# Altium PCB BeagleBone_Black_RevB4_V1.PcbDoc (part 1 of 2)
Units mm, origin at the board's own origin, x right, y up, seen from the top; angles counter-clockwise.
Board outline 100 x 101.6 mm, 4 copper layers (Top Layer, Layer 1, Layer 2, Bottom Layer), stack 0.603 mm thick; 71 components, 245 nets, 903 pads, 74 vias.
Unrouted connection lines stored in the file: 485.
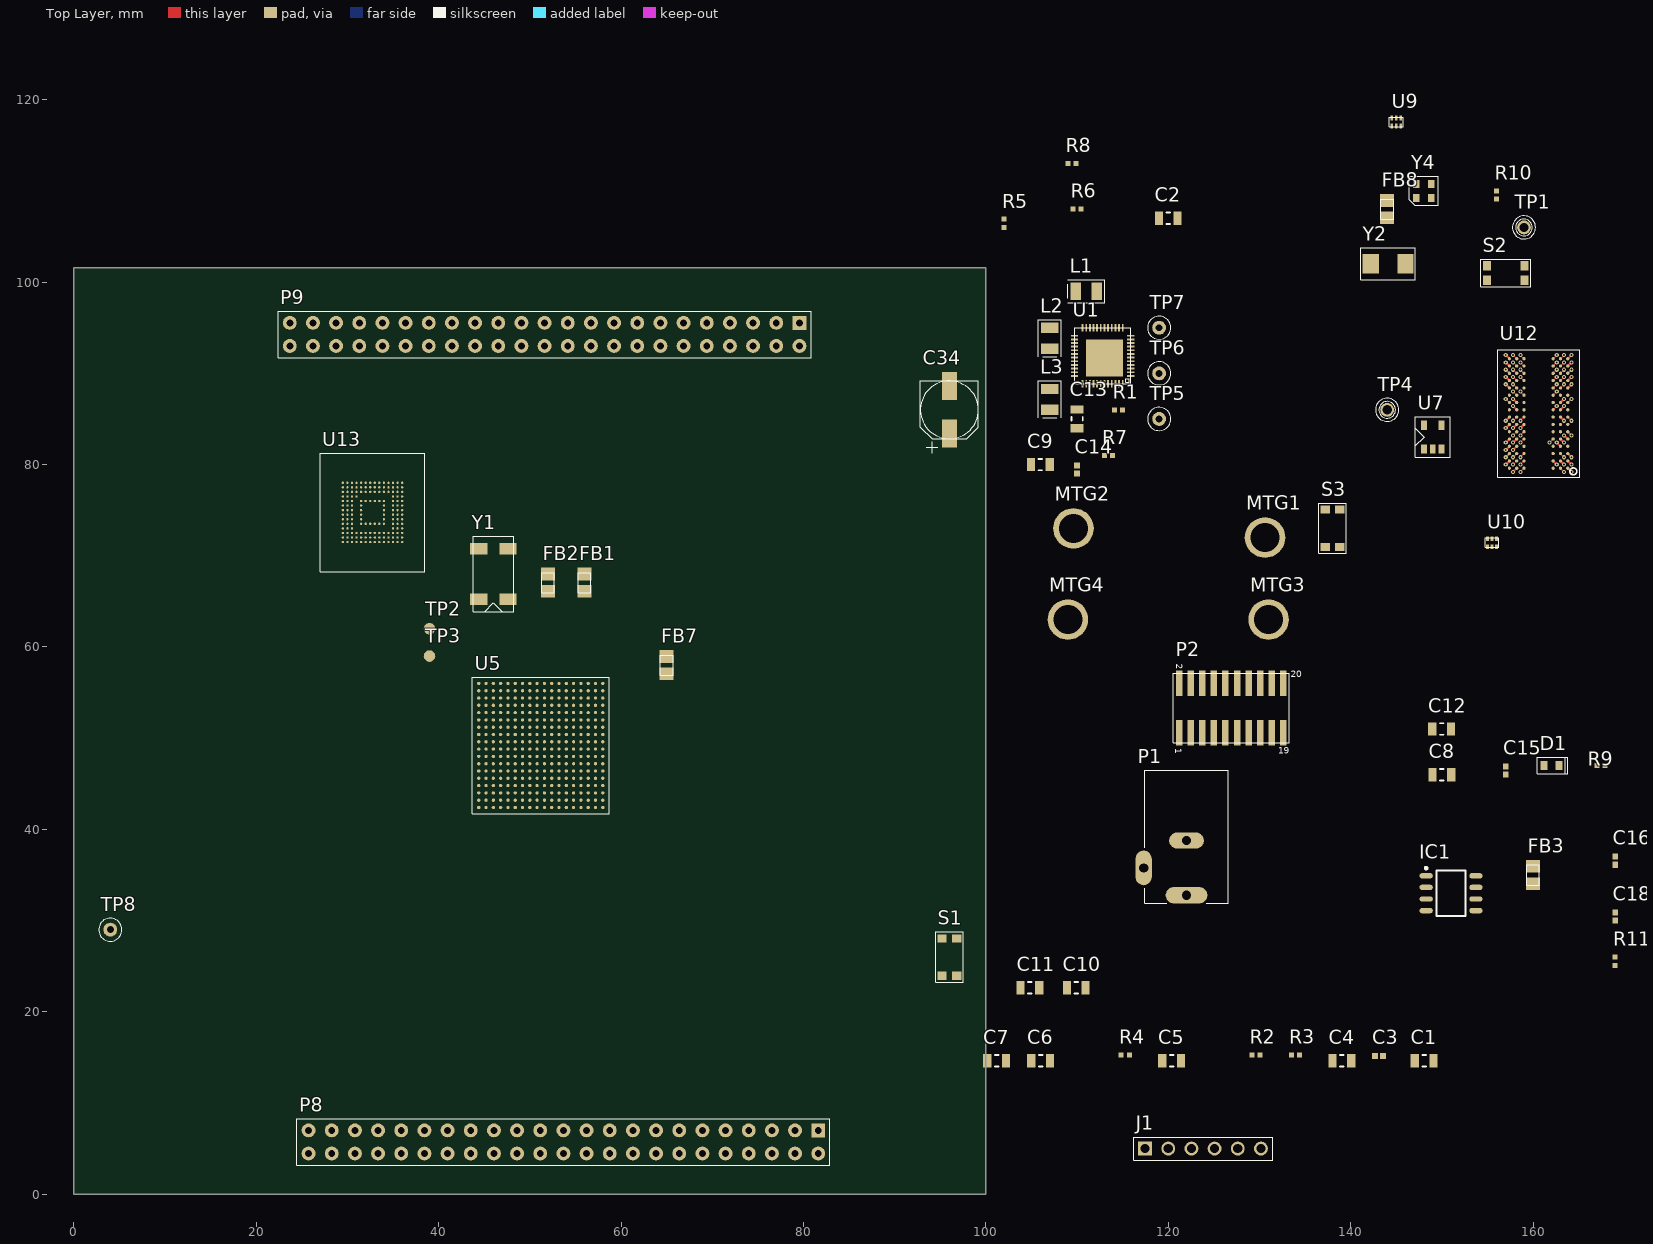
[diagram p0: Top Layer view]
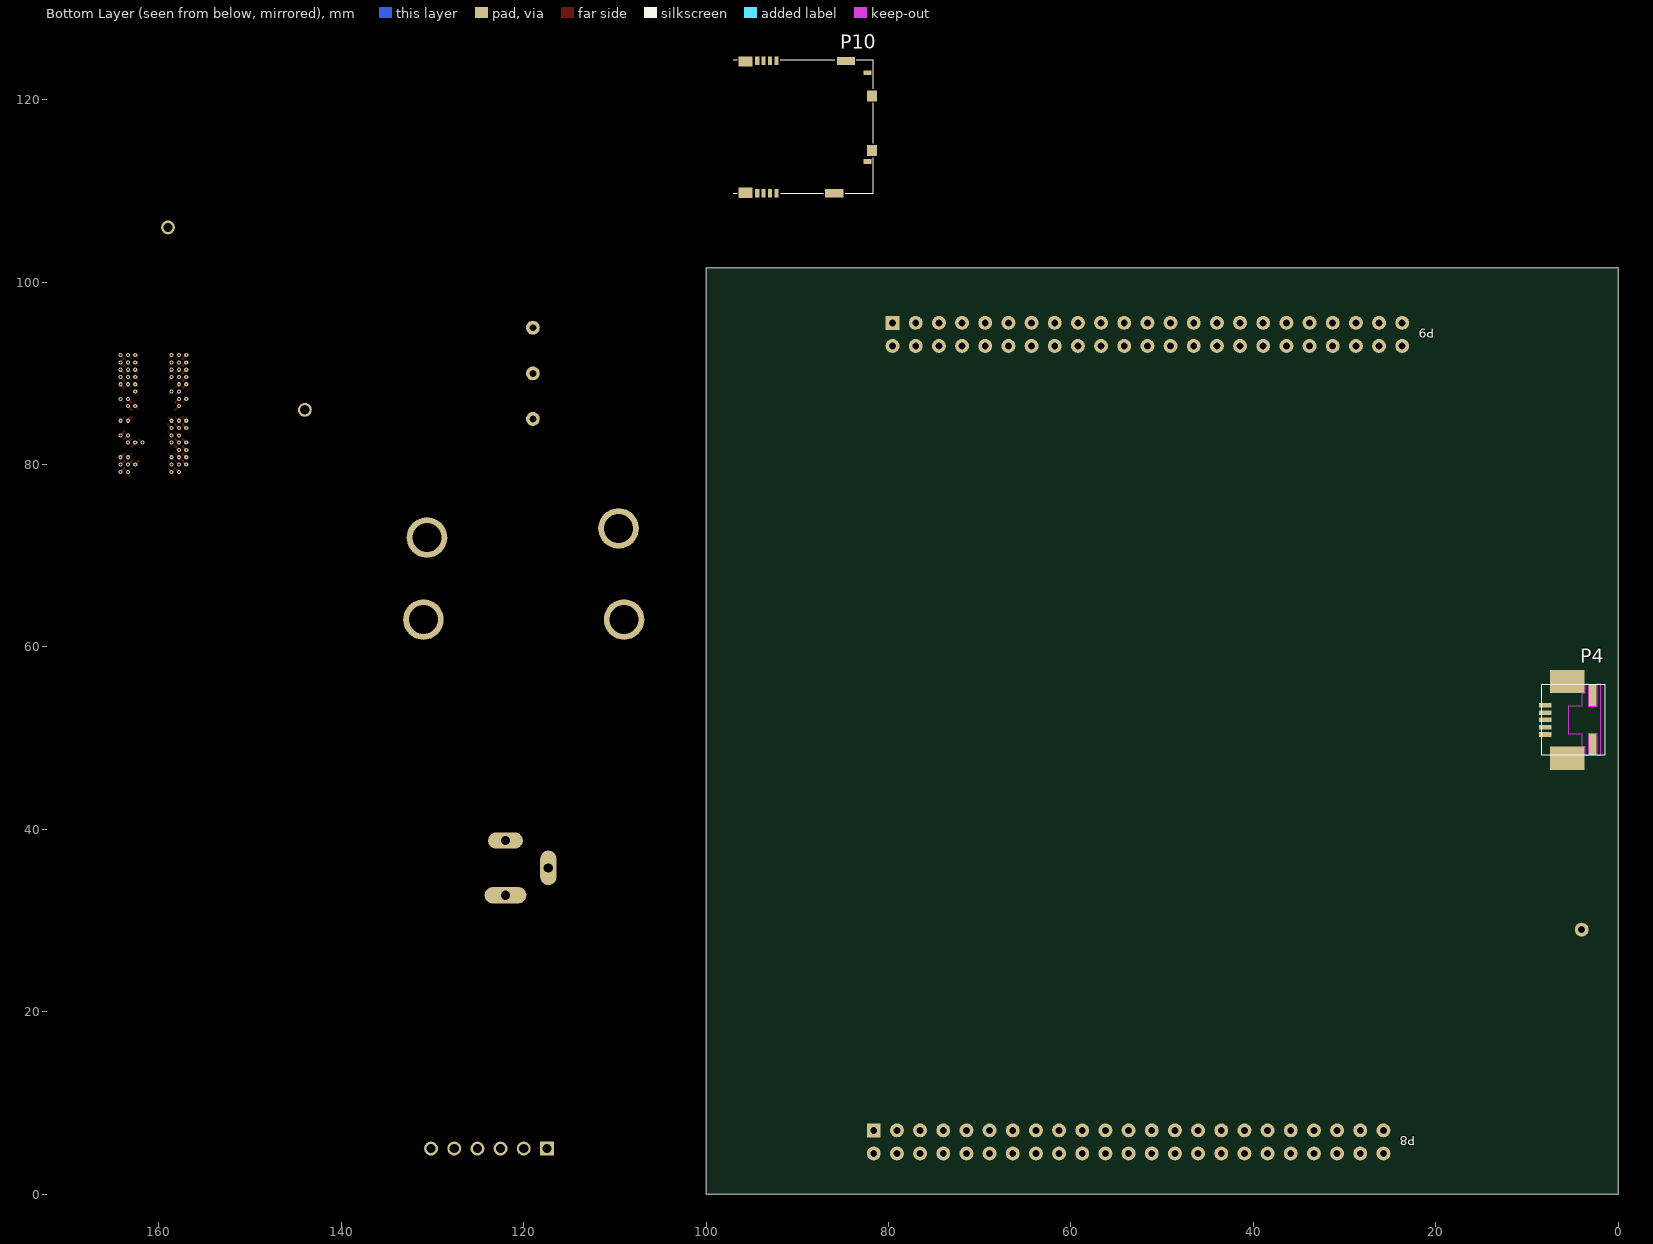
[diagram p1: Bottom Layer view, seen from below]
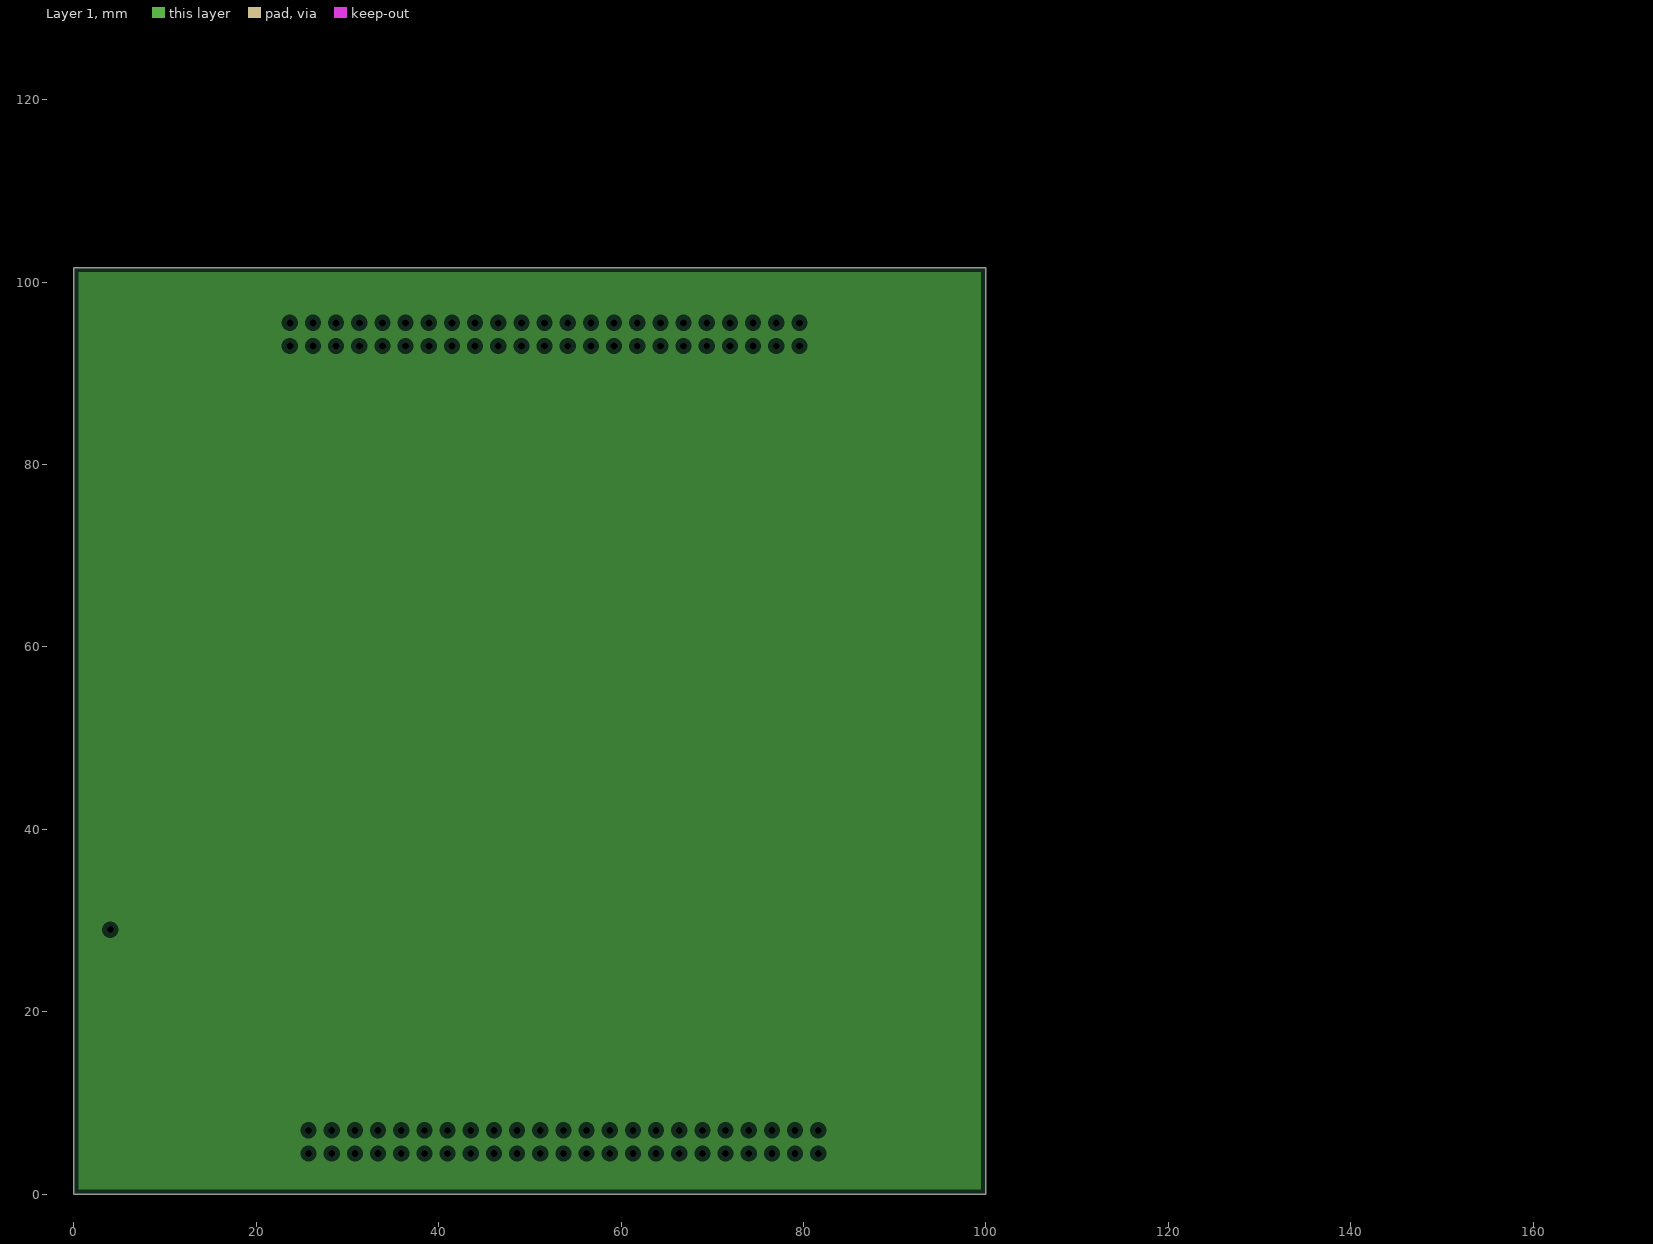
[diagram p2: Layer 1, clearances drawn from the general rule]
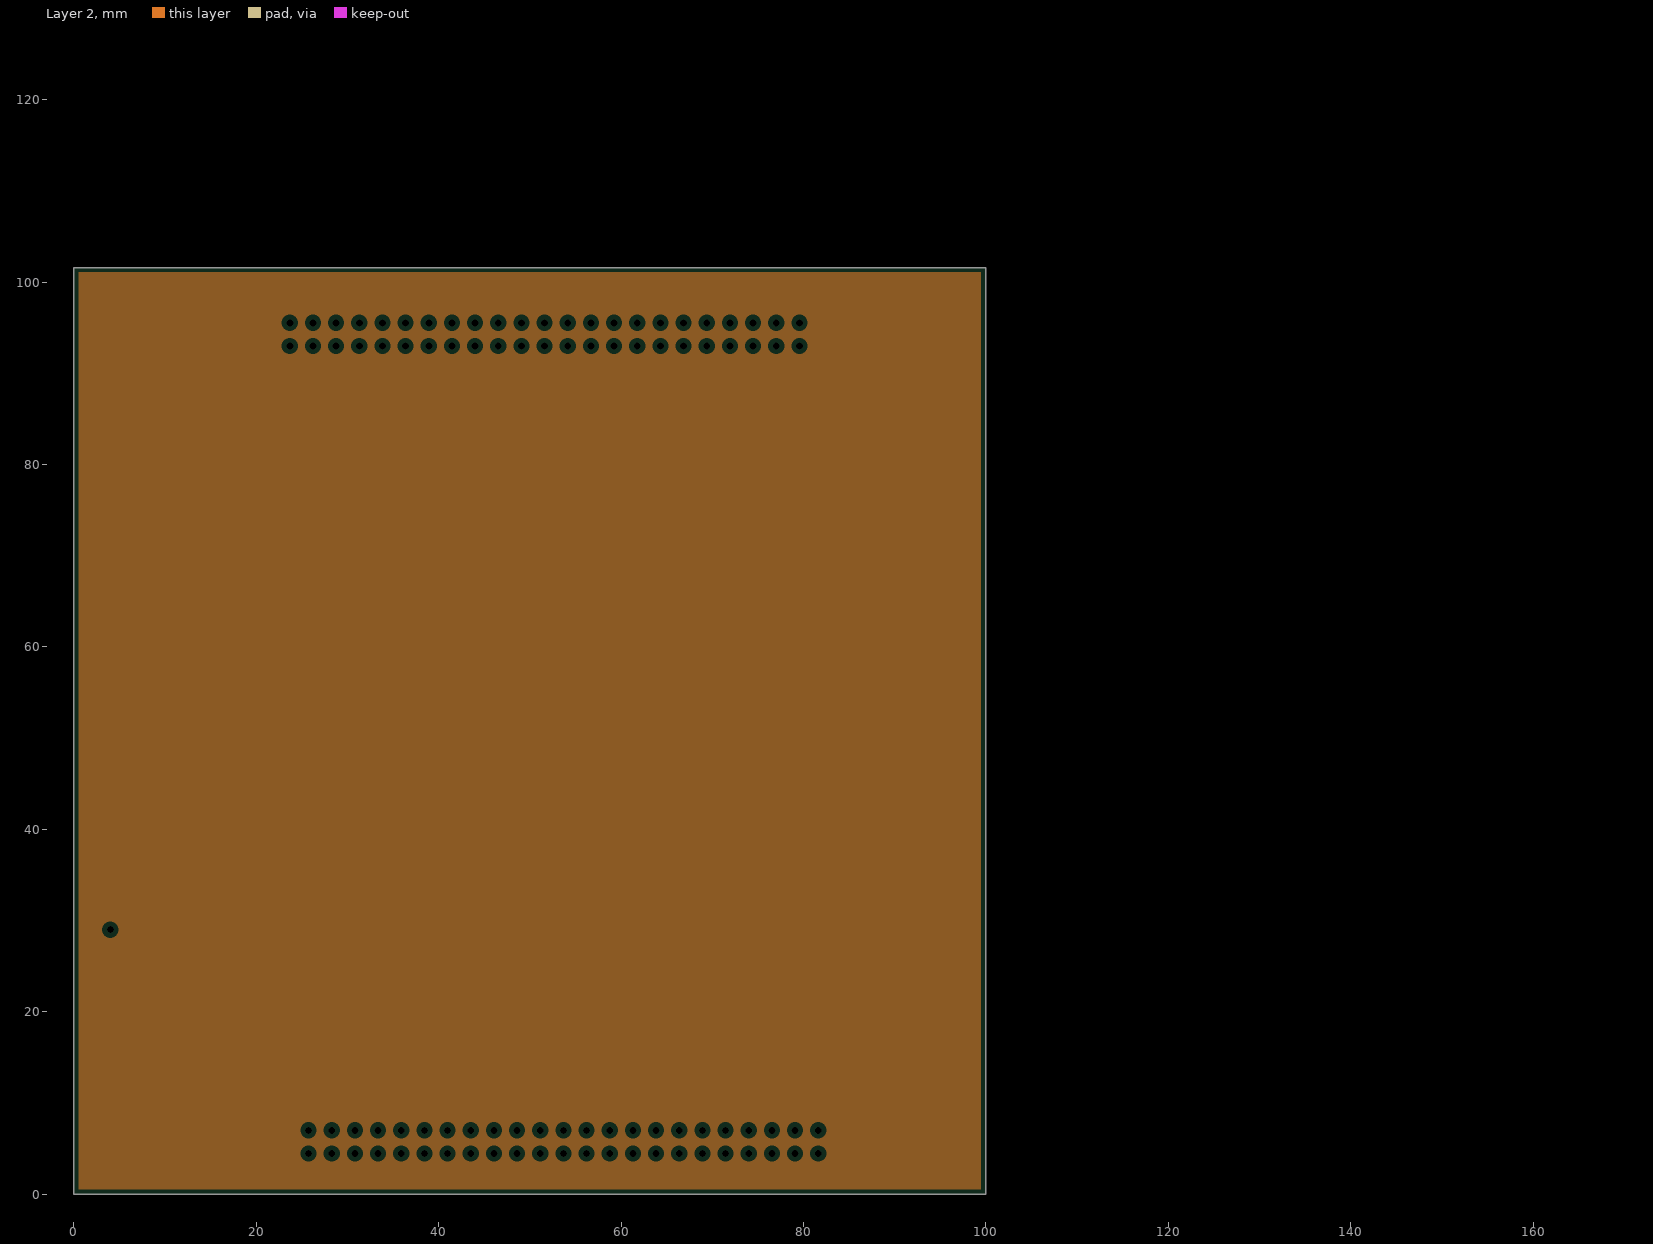
[diagram p3: Layer 2, clearances drawn from the general rule]

## Layer stack, top to bottom
Top Solder: solder mask 0.0102, Solder Resist, Dk 3.5
Top Layer: signal copper 0.0356
Dielectric 2: prepreg 0.0711, PP-006, Dk 4.1
Layer 1: plane copper 0.035
Dielectric 1: dielectric 0.32, FR-4, Dk 4.8
Layer 2: plane copper 0.035
Dielectric 3: prepreg 0.0711, PP-006, Dk 4.1
Bottom Layer: signal copper 0.0356
Bottom Solder: solder mask 0.0102, Solder Resist, Dk 3.5

## Board outline
0,0 100,0 100,101.6 0,101.6

## Design rules (kind name [scope] priority, off if disabled: settings)
Clearance [All] p1: gap=0.254 ignorepadtopadclearanceinfootprint=FALSE except(0: Arc-Hole Track-Hole SMDPad-Hole THPad-Hole Via-Hole Fill-Hole Poly-Hole Region-Hole Text-Hole)
PlaneClearance [All] p1: clearance=0.508
PlaneConnect [All] p1: planeconnectstyle=Relief reliefexpansion=0.508 reliefentries=4 reliefconductorwidth=0.254 reliefairgap=0.254
PolygonConnect [All] p1: connectstyle=Relief reliefconductorwidth=0.254 reliefentries=4 polygonreliefangle="90 Angle" airgapwidth=0.254
RoutingVias [All] p1: holewidth=0.711 width=1.27 viastyle="Through Hole" minholewidth=0.711 minwidth=1.27 maxholewidth=0.711 maxwidth=1.27
SolderMaskExpansion [All] p1: expansion=0.102
Width [All] p1: maxlimit=0.254 minlimit=0.254 preferedwidth=0.254
28 further rules are at their usual default settings.

## Classes and differential pairs
net class DDR_D[15..0]: DDR_D0 DDR_D1 DDR_D2 DDR_D3 DDR_D4 DDR_D5 DDR_D6 DDR_D7 DDR_D8 DDR_D9 DDR_D10 DDR_D11 DDR_D12 DDR_D13 DDR_D14 DDR_D15
net class DDR_BA[2..0]: DDR_BA0 DDR_BA1 DDR_BA2
net class DDR_A[15..0]: DDR_A0 DDR_A1 DDR_A2 DDR_A3 DDR_A4 DDR_A5 DDR_A6 DDR_A7 DDR_A8 DDR_A9 DDR_A10 DDR_A11 DDR_A12 DDR_A13 DDR_A14 DDR_A15
component class "P11_Exp Conn, uSD, and ": C152 C153 C154 P8 P9 R150 R151 R152 R153 R154 R155 R156 R157 TP4 U7
component class P08_eMMC: C125 C126 C127 C128 C129 C130 R101 R102 R103 R104 R105 R106 R107 R108 R109 R110 R111 U13
component class "P07_DDR3 Memory": C107 C108 C109 C110 C111 C112 C113 C114 C115 C116 C117 C118 C119 C120 C121 C122 C123 C124 R96 R97 R98 R99 R100 U12
component class "P06_LED, Config, & Button": R55 R56 R57 R58 R59 R60 R61 R62 R63 R64 R65 R66 R67 R68 R69 R70 R75 R80 R81 R82 R83 R84 R85 R86 R87 R88 R89 R90 R91 R92 R93 R94 R95 S2
component class "P04_Processor 2 or 3, USB and Serial": C31 C32 C33 C34 C35 C36 C155 FB7 FB8 J1 P4 R26 R27 R28 R45 R46 R47 R48 R49 R50 R51 R52 R53 R159 R163 R164 R165 U8 U9 U10 U15
component class "P03_Processor 1 of 3, JTAG Header": C21 C22 C24 C25 C26 C27 C28 C29 C30 C158 C159 P2 R14 R17 R18 R19 R20 R21 R22 R23 R24 R25 R160 R161 R162 R167 S1 U3 U5 U6 Y1 Y2 Y4
component class "P02_Power Management": C1 C2 C3 C4 C5 C6 C7 C8 C9 C10 C11 C12 C13 C14 C15 C16 C17 C18 D1 IC1 L1 L2 L3 MTG1 MTG2 MTG3 MTG4 P1 R1 R2 R3 R4 R5 R6 R7 R8 R9 R10 R11 S3 TP1 TP5 TP6 TP7 TP8 U1

## Components (designator, comment, footprint, x,y, rotation, side; value= is the part's Value field where it differs from the comment)
C1 "C2012X6S1A106K085AC" CAP0805 148.046,14.64 r0 top
C2 "C2012X6S1A106K085AC" CAP0805 120,107 r0 top
C3 "C0402C104K4RACTU" CAP0402 143.093,15.148 r0 top
C4 "C2012X6S1A106K085AC" CAP0805 139.029,14.64 r0 top
C5 "C2012X6S1A106K085AC" CAP0805 120.36,14.64 r0 top
C6 "C2012X6S1A106K085AC" CAP0805 106.009,14.64 r0 top
C7 "C2012X6S1A106K085AC" CAP0805 101.183,14.64 r0 top
C8 "C2012X6S1A106K085AC" CAP0805 150,46 r0 top
C9 "C2012X6S1A106K085AC" CAP0805 105.975,80 r0 top
C10 "C2012X6S1A106K085AC" CAP0805 109.907,22.64 r0 top
C11 "C2012X6S1A106K085AC" CAP0805 104.827,22.64 r0 top
C12 "C2012X6S1A106K085AC" CAP0805 149.975,51 r0 top
C13 "C2012X6S1A106K085AC" CAP0805 110,85 r90 top
C14 "C1005X5R0J225K050BC" CAP0402 110,79.44 r90 top
C15 "C1005X5R0J225K050BC" CAP0402 157,46.44 r90 top
C16 "C1005X5R0J225K050BC" CAP0402 169,36.56 r90 top
C18 "C0402C104K4RACTU" CAP0402 169,30.44 r90 top
C34 "100uF, 6V3" RD205SMD_250D 96,86 r90 top
D1 "598-8170-107F" LED_0603 162,47 r180 top
FB1 "150OHM800mA" SM-7351-IND-0805 56,67.05 r90 top
FB2 "150OHM800mA" SM-7351-IND-0805 52,67.05 r90 top
FB3 "150OHM800mA" SM-7351-IND-0805 160,35 r90 top
FB7 "150OHM800mA" SM-7351-IND-0805 65,58 r90 top
FB8 "0.1 Ohm, 0805" SM-7351-IND-0805 144,108 r90 top
IC1 "TL5209" SOIC-8 151,33 r0 top
J1 "HEADER 6" SIP6 123.81,5 r90 top
L1 "2.2uH, 2.6A" 2520 111,99 r180 top
L2 "2.2uH, 2.6A" 2520 107,93.857 r270 top
L3 "2.2uH, 2.6A" 2520 107,87.143 r270 top
MTG1 "MHOLE" MTGH200C125D_PL 131,72 r0 top
MTG2 "MHOLE" MTGH200C125D_PL 110,73 r0 top
MTG3 "MHOLE" MTGH200C125D_PL 131.394,63 r0 top
MTG4 "MHOLE" MTGH200C125D_PL 109.394,63 r0 top
P1 "PJ-200A" CONN3-PWR-PJ102A 122,39 r90 top
P2 "CTI JTAG,DNI" HEADER10X2_SMD 126.905,53.295 r180 top
P4 "mini USB-B" USB5MINI_4SHIELDED_SMD-5 5,52 r180 bottom
P8 "FEMALE HEADER 2x23" HEADER23X2 53.68,5.73 r180 top
P9 "FEMALE HEADER 2x23" HEADER23X2 51.62,94.27 r180 top
P10 "MOLEX 502570-001" SD-MICRO-SCHA5B0300 89,117 r90 bottom
R1 "RC0402FR-07100KL" RES0402 114.55,86 r180 top
R2 "RC0402FR-071K5L" RES0402 129.631,15.275 r0 top
R3 "RC0402FR-071K5L" RES0402 133.949,15.275 r0 top
R4 "RC0402JR-070RL" RES0402 115.28,15.275 r0 top
R5 "RC0402JR-070RL" RES0402 102,106.45 r90 top
R6 "RC0402JR-070RL" RES0402 110,108 r0 top
R7 "RC0402JR-070RL" RES0402 113.45,81 r0 top
R8 "RC0402JR-070RL" RES0402 109.45,113 r0 top
R9 "RC0402FR-07820RL" RES0402 167.45,47 r0 top
R10 "RC0402FR-07470KL" RES0402 156,109.55 r90 top
R11 "RC0402FR-07280KL" RES0402 169,25.55 r90 top
S1 "KMR231GLFS" SW4SMD_63X161LS 96,26 r90 top
S2 "KMR231GLFS" SW4SMD_63X161LS 157,101 r0 top
S3 "KMR231GLFS" SW4SMD_63X161LS 138,73 r270 top
TP1 "TESTPT1" tp1-8040 159,106 r0 top
TP2 "TESTPT1" TP60C_SMD 39,62 r90 top
TP3 "TESTPT1" TP60C_SMD 39,59 r90 top
TP4 "TESTPT1" tp1-8040 144,86 r0 top
TP5 "TESTPT1" TP60C33D 119,85 r0 top
TP6 "TESTPT1" TP60C33D 119,90 r0 top
TP7 "TESTPT1" TP60C33D 119,95 r0 top
TP8 "TESTPT1" TP60C33D 4,29 r0 top
U1 "TPS65217C" U_48_RSL 112.8,91.925 r180 top
U5 "IC_AM335X_ZCE_1" am33xx_15x15 51.2,49.2 r0 top
U7 "24LC32A" SOT23-5 149,83 r180 top
U9 "TPD4S012" U_6_DRY 145,117.561 r0 top
U10 "TPD4S012" U_6_DRY 155.5,71.439 r0 top
U12 "MT41K256M16HA -125:E" BGA96_T9_P8_9X14 160.6,85.6 r180 top
U13 "eMMC, 2GB" BGA153_P14_P5_11P5X13 32.75,74.75 r0 top
Y1 "32.768kHz" XTAL4_126-216SMD 46,68 r90 top
Y2 "24MHz" XTAL150SMD_125X196 144.1,102 r180 top
Y4 "24.576MHz" OSC4_61X65LS_79X98SMD 148,110 r0 top

## Footprints (in the part's own frame and the unit in brackets; to place one, negate y for a bottom-side part, rotate by r counter-clockwise, add the part's x,y. Pads: shape width x height; smd on the part's side, far side on the other; paste and mask are expansions set on the pad)
2520 [mil] "2520"
  rect 45x75 smd mask+2: 1(45,0) 2(-45,0)
  silkscreen extent -80,-50 80,50
am33xx_15x15 [mil] "AM33XX_15X15"
  round 14 smd mask+0: A1(-267.72,267.72) A2(-236.22,267.72) A3(-204.72,267.72) A4(-173.23,267.72) A5(-141.73,267.72) A6(-110.24,267.72) A7(-78.74,267.72) A8(-47.24,267.72) A9(-15.75,267.72) A10(15.75,267.72) A11(47.24,267.72) A12(78.74,267.72) A13(110.24,267.72) A14(141.73,267.72) A15(173.23,267.72) A16(204.72,267.72) A17(236.22,267.72) A18(267.72,267.72) B1(-267.72,236.22) B2(-236.22,236.22) B3(-204.72,236.22) B4(-173.23,236.22) B5(-141.73,236.22) B6(-110.24,236.22) B7(-78.74,236.22) B8(-47.24,236.22) B9(-15.75,236.22) B10(15.75,236.22) B11(47.24,236.22) B12(78.74,236.22) B13(110.24,236.22) B14(141.73,236.22) B15(173.23,236.22) B16(204.72,236.22) B17(236.22,236.22) B18(267.72,236.22) C1(-267.72,204.72) C2(-236.22,204.72) C3(-204.72,204.72) C4(-173.23,204.72) C5(-141.73,204.72) C6(-110.24,204.72) C7(-78.74,204.72) C8(-47.24,204.72) C9(-15.75,204.72) C10(15.75,204.72) C11(47.24,204.72) C12(78.74,204.72) C13(110.24,204.72) C14(141.73,204.72) C15(173.23,204.72) C16(204.72,204.72) C17(236.22,204.72) C18(267.72,204.72) D1(-267.72,173.23) D2(-236.22,173.23) D3(-204.72,173.23) D4(-173.23,173.23) D5(-141.73,173.23) D6(-110.24,173.23) D7(-78.74,173.23) D8(-47.24,173.23) D9(-15.75,173.23) D10(15.75,173.23) D11(47.24,173.23) D12(78.74,173.23) D13(110.24,173.23) D14(141.73,173.23) D15(173.23,173.23) D16(204.72,173.23) D17(236.22,173.23) D18(267.72,173.23) E1(-267.72,141.73) E2(-236.22,141.73) E3(-204.72,141.73) E4(-173.23,141.73) E5(-141.73,141.73) E6(-110.24,141.73) E7(-78.74,141.73) E8(-47.24,141.73) E9(-15.75,141.73) E10(15.75,141.73) E11(47.24,141.73) E12(78.74,141.73) E13(110.24,141.73) E14(141.73,141.73) E15(173.23,141.73) E16(204.72,141.73) E17(236.22,141.73) E18(267.72,141.73) F1(-267.72,110.24) F2(-236.22,110.24) F3(-204.72,110.24) F4(-173.23,110.24) F5(-141.73,110.24) F6(-110.24,110.24) F7(-78.74,110.24) F8(-47.24,110.24) F9(-15.75,110.24) F10(15.75,110.24) F11(47.24,110.24) F12(78.74,110.24) F13(110.24,110.24) F14(141.73,110.24) F15(173.23,110.24) F16(204.72,110.24) F17(236.22,110.24) F18(267.72,110.24) G1(-267.72,78.74) G2(-236.22,78.74) G3(-204.72,78.74) G4(-173.23,78.74) G5(-141.73,78.74) G6(-110.24,78.74) G7(-78.74,78.74) G8(-47.24,78.74) G9(-15.75,78.74) G10(15.75,78.74) G11(47.24,78.74) G12(78.74,78.74) G13(110.24,78.74) G14(141.73,78.74) G15(173.23,78.74) G16(204.72,78.74) G17(236.22,78.74) G18(267.72,78.74) H1(-267.72,47.24) H2(-236.22,47.24) H3(-204.72,47.24) H4(-173.23,47.24) H5(-141.73,47.24) H6(-110.24,47.24) H7(-78.74,47.24) H8(-47.24,47.24) H9(-15.75,47.24) H10(15.75,47.24) H11(47.24,47.24) H12(78.74,47.24) H13(110.24,47.24) H14(141.73,47.24) H15(173.23,47.24) H16(204.72,47.24) H17(236.22,47.24) H18(267.72,47.24) J1(-267.72,15.75) J2(-236.22,15.75) J3(-204.72,15.75) J4(-173.23,15.75) J5(-141.73,15.75) J6(-110.24,15.75) J7(-78.74,15.75) J8(-47.24,15.75) J9(-15.75,15.75) J10(15.75,15.75) J11(47.24,15.75) J12(78.74,15.75) J13(110.24,15.75) J14(141.73,15.75) J15(173.23,15.75) J16(204.72,15.75) J17(236.22,15.75) J18(267.72,15.75) K1(-267.72,-15.75) K2(-236.22,-15.75) K3(-204.72,-15.75) K4(-173.23,-15.75) K5(-141.73,-15.75) K6(-110.24,-15.75) K7(-78.74,-15.75) K8(-47.24,-15.75) K9(-15.75,-15.75) K10(15.75,-15.75) K11(47.24,-15.75) K12(78.74,-15.75) K13(110.24,-15.75) K14(141.73,-15.75) K15(173.23,-15.75) K16(204.72,-15.75) K17(236.22,-15.75) K18(267.72,-15.75) L1(-267.72,-47.24) L2(-236.22,-47.24) L3(-204.72,-47.24) L4(-173.23,-47.24) L5(-141.73,-47.24) L6(-110.24,-47.24) L7(-78.74,-47.24) L8(-47.24,-47.24) L9(-15.75,-47.24) L10(15.75,-47.24) L11(47.24,-47.24) L12(78.74,-47.24) L13(110.24,-47.24) L14(141.73,-47.24) L15(173.23,-47.24) L16(204.72,-47.24) L17(236.22,-47.24) L18(267.72,-47.24) M1(-267.72,-78.74) M2(-236.22,-78.74) M3(-204.72,-78.74) M4(-173.23,-78.74) M5(-141.73,-78.74) M6(-110.24,-78.74) M7(-78.74,-78.74) M8(-47.24,-78.74) M9(-15.75,-78.74) M10(15.75,-78.74) M11(47.24,-78.74) M12(78.74,-78.74) M13(110.24,-78.74) M14(141.73,-78.74) M15(173.23,-78.74) M16(204.72,-78.74) M17(236.22,-78.74) M18(267.72,-78.74) N1(-267.72,-110.24) N2(-236.22,-110.24) N3(-204.72,-110.24) N4(-173.23,-110.24) N5(-141.73,-110.24) N6(-110.24,-110.24) N7(-78.74,-110.24) N8(-47.24,-110.24) N9(-15.75,-110.24) N10(15.75,-110.24) N11(47.24,-110.24) N12(78.74,-110.24) N13(110.24,-110.24) N14(141.73,-110.24) N15(173.23,-110.24) N16(204.72,-110.24) N17(236.22,-110.24) N18(267.72,-110.24) P1(-267.72,-141.73) P2(-236.22,-141.73) P3(-204.72,-141.73) P4(-173.23,-141.73) P5(-141.73,-141.73) P6(-110.24,-141.73) P7(-78.74,-141.73) P8(-47.24,-141.73) P9(-15.75,-141.73) P10(15.75,-141.73) P11(47.24,-141.73) P12(78.74,-141.73) P13(110.24,-141.73) P14(141.73,-141.73) P15(173.23,-141.73) P16(204.72,-141.73) P17(236.22,-141.73) P18(267.72,-141.73) R1(-267.72,-173.23) R2(-236.22,-173.23) R3(-204.72,-173.23) R4(-173.23,-173.23) R5(-141.73,-173.23) R6(-110.24,-173.23) R7(-78.74,-173.23) R8(-47.24,-173.23) R9(-15.75,-173.23) R10(15.75,-173.23) R11(47.24,-173.23) R12(78.74,-173.23) R13(110.24,-173.23) R14(141.73,-173.23) R15(173.23,-173.23) R16(204.72,-173.23) R17(236.22,-173.23) R18(267.72,-173.23) T1(-267.72,-204.72) T2(-236.22,-204.72) T3(-204.72,-204.72) T4(-173.23,-204.72) T5(-141.73,-204.72) T6(-110.24,-204.72) T7(-78.74,-204.72) T8(-47.24,-204.72) T9(-15.75,-204.72) T10(15.75,-204.72) T11(47.24,-204.72) T12(78.74,-204.72) T13(110.24,-204.72) T14(141.73,-204.72) T15(173.23,-204.72) T16(204.72,-204.72) T17(236.22,-204.72) T18(267.72,-204.72) U1(-267.72,-236.22) U2(-236.22,-236.22) U3(-204.72,-236.22) U4(-173.23,-236.22) U5(-141.73,-236.22) U6(-110.24,-236.22) U7(-78.74,-236.22) U8(-47.24,-236.22) U9(-15.75,-236.22) U10(15.75,-236.22) U11(47.24,-236.22) U12(78.74,-236.22) U13(110.24,-236.22) U14(141.73,-236.22) U15(173.23,-236.22) U16(204.72,-236.22) U17(236.22,-236.22) U18(267.72,-236.22) V1(-267.72,-267.72) V2(-236.22,-267.72) V3(-204.72,-267.72) V4(-173.23,-267.72) V5(-141.73,-267.72) V6(-110.24,-267.72) V7(-78.74,-267.72) V8(-47.24,-267.72) V9(-15.75,-267.72) V10(15.75,-267.72) V11(47.24,-267.72) V12(78.74,-267.72) V13(110.24,-267.72) V14(141.73,-267.72) V15(173.23,-267.72) V16(204.72,-267.72) V17(236.22,-267.72) V18(267.72,-267.72)
  silkscreen extent -295,-295 295,295
BGA96_T9_P8_9X14 [mil] "BGA96_T9_P8_9X14"
  round 14 smd mask+2: A1(-126,236.25) A2(-94.5,236.25) A3(-63,236.25) A7(63,236.25) A8(94.5,236.25) A9(126,236.25) B1(-126,204.75) B2(-94.5,204.75) B3(-63,204.75) B7(63,204.75) B8(94.5,204.75) B9(126,204.75) C1(-126,173.25) C2(-94.5,173.25) C3(-63,173.25) C7(63,173.25) C8(94.5,173.25) C9(126,173.25) D1(-126,141.75) D2(-94.5,141.75) D3(-63,141.75) D7(63,141.75) D8(94.5,141.75) D9(126,141.75) E1(-126,110.25) E2(-94.5,110.25) E3(-63,110.25) E7(63,110.25) E8(94.5,110.25) E9(126,110.25) F1(-126,78.75) F2(-94.5,78.75) F3(-63,78.75) F7(63,78.75) F8(94.5,78.75) F9(126,78.75) G1(-126,47.25) G2(-94.5,47.25) G3(-63,47.25) G7(63,47.25) G8(94.5,47.25) G9(126,47.25) H1(-126,15.75) H2(-94.5,15.75) H3(-63,15.75) H7(63,15.75) H8(94.5,15.75) H9(126,15.75) J1(-126,-15.75) J2(-94.5,-15.75) J3(-63,-15.75) J7(63,-15.75) J8(94.5,-15.75) J9(126,-15.75) K1(-126,-47.25) K2(-94.5,-47.25) K3(-63,-47.25) K7(63,-47.25) K8(94.5,-47.25) K9(126,-47.25) L1(-126,-78.75) L2(-94.5,-78.75) L3(-63,-78.75) L7(63,-78.75) L8(94.5,-78.75) L9(126,-78.75) M1(-126,-110.25) M2(-94.5,-110.25) M3(-63,-110.25) M7(63,-110.25) M8(94.5,-110.25) M9(126,-110.25) N1(-126,-141.75) N2(-94.5,-141.75) N3(-63,-141.75) N7(63,-141.75) N8(94.5,-141.75) N9(126,-141.75) P1(-126,-173.25) P2(-94.5,-173.25) P3(-63,-173.25) P7(63,-173.25) P8(94.5,-173.25) P9(126,-173.25) R1(-126,-204.75) R2(-94.5,-204.75) R3(-63,-204.75) R7(63,-204.75) R8(94.5,-204.75) R9(126,-204.75) T1(-126,-236.25) T2(-94.5,-236.25) T3(-63,-236.25) T7(63,-236.25) T8(94.5,-236.25) T9(126,-236.25)
  Top Layer lines w4.75: 141.75,-63 126,-47.25 ; 110.25,220.5 94.5,204.75 ; 110.25,189 94.5,173.25 ; 110.25,94.5 94.5,78.75 ; 110.25,31.5 94.5,15.75 ; 110.25,-94.5 94.5,-78.75 ; 110.25,-126 94.5,-110.25 ; 110.25,-157.5 94.5,-141.75 ; 110.25,-189 94.5,-173.25 ; 110.25,-220.5 94.5,-204.75 ; 110.25,-252 94.5,-236.25 ; 78.75,252 63,236.25 ; 78.75,220.5 63,204.75 ; 78.75,189 63,173.25 ; 78.75,126 63,110.25 ; 78.75,94.5 63,78.75 ; 78.75,31.5 63,15.75 ; 78.75,-94.5 63,-78.75 ; 78.75,-157.5 63,-141.75 ; 78.75,-189 63,-173.25 ; 78.75,-220.5 63,-204.75 ; 78.75,-252 63,-236.25 ; -47.25,126 -63,110.25 ; -63,-15.75 -78.75,-31.5 ; -63,-78.75 -78.75,-94.5 ; -63,-110.25 -78.75,-126 ; -63,-141.75 -78.75,-157.5 ; -63,-173.25 -78.75,-189 ; -63,-204.75 -78.75,-220.5 ; -63,-236.25 -78.75,-252 ; -94.5,236.25 -110.25,252 ; -94.5,173.25 -110.25,189 ; -94.5,-110.25 -110.25,-126 ; -94.5,-141.75 -110.25,-157.5 ; -94.5,-173.25 -110.25,-189 ; -94.5,-204.75 -110.25,-220.5 ; -94.5,-236.25 -110.25,-252 ; -126,15.75 -141.75,31.5 ; -126,-47.25 -141.75,-63
  Top Layer lines w10: 141.75,220.5 126,204.75 ; 141.75,189 126,173.25 ; 141.75,157.5 126,141.75 ; 141.75,126 126,110.25 ; 141.75,63 126,47.25 ; 141.75,31.5 126,15.75 ; 141.75,-126 126,-110.25 ; 141.75,-157.5 126,-141.75 ; 141.75,-189 126,-173.25 ; 141.75,-220.5 126,-204.75 ; 141.75,-252 126,-236.25 ; 110.25,252 94.5,236.25 ; 110.25,157.5 94.5,141.75 ; 110.25,126 94.5,110.25 ; 110.25,63 94.5,47.25 ; 110.25,-31.5 94.5,-15.75 ; 110.25,-63 94.5,-47.25 ; 78.75,63 63,47.25 ; -63,204.75 -78.75,220.5 ; -78.75,126 -94.5,141.75 ; -94.5,204.75 -110.25,220.5 ; -94.5,110.25 -110.25,126 ; -94.5,15.75 -110.25,31.5 ; -94.5,-15.75 -110.25,-31.5 ; -94.5,-47.25 -110.25,-63 ; -110.25,94.5 -126,110.25 ; -126,236.25 -141.75,252 ; -126,204.75 -141.75,220.5 ; -126,173.25 -141.75,189 ; -126,78.75 -141.75,94.5 ; -126,-110.25 -141.75,-126 ; -126,-141.75 -141.75,-157.5 ; -126,-173.25 -141.75,-189 ; -126,-204.75 -141.75,-220.5 ; -126,-236.25 -141.75,-252
  silkscreen extent -177,-276 177,276
BGA153_P14_P5_11P5X13 [mil] "BGA153_P14_P5_11P5X13"
  round 10 smd mask+2: A1(-127.95,127.95) A2(-108.27,127.95) A3(-88.58,127.95) A4(-68.9,127.95) A5(-49.21,127.95) A6(-29.53,127.95) A7(-9.84,127.95) A8(9.84,127.95) A9(29.53,127.95) A10(49.21,127.95) A11(68.9,127.95) A12(88.58,127.95) A13(108.27,127.95) A14(127.95,127.95) B1(-127.95,108.27) B2(-108.27,108.27) B3(-88.58,108.27) B4(-68.9,108.27) B5(-49.21,108.27) B6(-29.53,108.27) B7(-9.84,108.27) B8(9.84,108.27) B9(29.53,108.27) B10(49.21,108.27) B11(68.9,108.27) B12(88.58,108.27) B13(108.27,108.27) B14(127.95,108.27) C1(-127.95,88.58) C2(-108.27,88.58) C3(-88.58,88.58) C4(-68.9,88.58) C5(-49.21,88.58) C6(-29.53,88.58) C7(-9.84,88.58) C8(9.84,88.58) C9(29.53,88.58) C10(49.21,88.58) C11(68.9,88.58) C12(88.58,88.58) C13(108.27,88.58) C14(127.95,88.58) D1(-127.95,68.9) D2(-108.27,68.9) D3(-88.58,68.9) D4(-68.9,68.9) D12(88.58,68.9) D13(108.27,68.9) D14(127.95,68.9) E1(-127.95,49.21) E2(-108.27,49.21) E3(-88.58,49.21) E5(-49.21,49.21) E6(-29.53,49.21) E7(-9.84,49.21) E8(9.84,49.21) E9(29.53,49.21) E10(49.21,49.21) E12(88.58,49.21) E13(108.27,49.21) E14(127.95,49.21) F1(-127.95,29.53) F2(-108.27,29.53) F3(-88.58,29.53) F5(-49.21,29.53) F10(49.21,29.53) F12(88.58,29.53) F13(108.27,29.53) F14(127.95,29.53) G1(-127.95,9.84) G2(-108.27,9.84) G3(-88.58,9.84) G5(-49.21,9.84) G10(49.21,9.84) G12(88.58,9.84) G13(108.27,9.84) G14(127.95,9.84) H1(-127.95,-9.84) H2(-108.27,-9.84) H3(-88.58,-9.84) H5(-49.21,-9.84) H10(49.21,-9.84) H12(88.58,-9.84) H13(108.27,-9.84) H14(127.95,-9.84) J1(-127.95,-29.53) J2(-108.27,-29.53) J3(-88.58,-29.53) J5(-49.21,-29.53) J10(49.21,-29.53) J12(88.58,-29.53) J13(108.27,-29.53) J14(127.95,-29.53) K1(-127.95,-49.21) K2(-108.27,-49.21) K3(-88.58,-49.21) K5(-49.21,-49.21) K6(-29.53,-49.21) K7(-9.84,-49.21) K8(9.84,-49.21) K9(29.53,-49.21) K10(49.21,-49.21) K12(88.58,-49.21) K13(108.27,-49.21) K14(127.95,-49.21) L1(-127.95,-68.9) L2(-108.27,-68.9) L3(-88.58,-68.9) L12(88.58,-68.9) L13(108.27,-68.9) L14(127.95,-68.9) M1(-127.95,-88.58) M2(-108.27,-88.58) M3(-88.58,-88.58) M4(-68.9,-88.58) M5(-49.21,-88.58) M6(-29.53,-88.58) M7(-9.84,-88.58) M8(9.84,-88.58) M9(29.53,-88.58) M10(49.21,-88.58) M11(68.9,-88.58) M12(88.58,-88.58) M13(108.27,-88.58) M14(127.95,-88.58) N1(-127.95,-108.27) N2(-108.27,-108.27) N3(-88.58,-108.27) N4(-68.9,-108.27) N5(-49.21,-108.27) N6(-29.53,-108.27) N7(-9.84,-108.27) N8(9.84,-108.27) N9(29.53,-108.27) N10(49.21,-108.27) N11(68.9,-108.27) N12(88.58,-108.27) N13(108.27,-108.27) N14(127.95,-108.27) P1(-127.95,-127.95) P2(-108.27,-127.95) P3(-88.58,-127.95) P4(-68.9,-127.95) P5(-49.21,-127.95) P6(-29.53,-127.95) P7(-9.84,-127.95) P8(9.84,-127.95) P9(29.53,-127.95) P10(49.21,-127.95) P11(68.9,-127.95) P12(88.58,-127.95) P13(108.27,-127.95) P14(127.95,-127.95)
  silkscreen extent -226,-256 226,256
CAP0402 [mm] "Chip Capacitor, 2-Leads, Body 1.00x0.50mm, IPC Medium Density"
  rect 0.66x0.62 smd: 1(-0.44,0) 2(0.44,0)
  body extent -0.53,-0.28 0.53,0.28, height 0.55
CAP0805 [mm] "Chip Capacitor, 2-Leads, Body 2.00x1.25mm, IPC Medium Density"
  rect 0.9x1.45 smd: 1(-1.025,0) 2(1.025,0)
  silkscreen extent -0.2,-0.63 0.2,0.63, body extent -1.1,-0.72 1.1,0.72, height 1.45
CONN3-PWR-PJ102A [mil] "CONN3-PWR-PJ102A"
  oval 70x180 hole 40 mask+2: 1(-245,0)
  oval 70x150 hole 40 mask+2: 2(-9,0)
  oval 150x70 hole 40 mask+2: 3(-127,185)
  silkscreen extent -280,-180 295,180
HEADER10X2_SMD [mil] "HEADER10X2_SMD"
  rect 28x110 smd mask+2: 1(225,106.5) 2(225,-106.5) 3(175,106.5) 4(175,-106.5) 5(125,106.5) 6(125,-106.5) 7(75,106.5) 8(75,-106.5) 9(25,106.5) 10(25,-106.5) 11(-25,106.5) 12(-25,-106.5) 13(-75,106.5) 14(-75,-106.5) 15(-125,106.5) 16(-125,-106.5) 17(-175,106.5) 18(-175,-106.5) 19(-225,106.5) 20(-225,-106.5)
  silkscreen extent -250,-150 250,150
HEADER23X2 [mil] "HEADER23X2"
  rect 60x60 hole 30 mask+2: 1(-1100,-50)
  round 60 hole 30 mask+2: 2(-1100,50) 3(-1000,-50) 4(-1000,50) 5(-900,-50) 6(-900,50) 7(-800,-50) 8(-800,50) 9(-700,-50) 10(-700,50) 11(-600,-50) 12(-600,50) 13(-500,-50) 14(-500,50) 15(-400,-50) 16(-400,50) 17(-300,-50) 18(-300,50) 19(-200,-50) 20(-200,50) 21(-100,-50) 22(-100,50) 23(0,-50) 24(0,50) 25(100,-50) 26(100,50) 27(200,-50) 28(200,50) 29(300,-50) 30(300,50) 31(400,-50) 32(400,50) 33(500,-50) 34(500,50) 35(600,-50) 36(600,50) 37(700,-50) 38(700,50) 39(800,-50) 40(800,50) 41(900,-50) 42(900,50) 43(1000,-50) 44(1000,50) 45(1100,-50) 46(1100,50)
  silkscreen extent -1150,-100 1150,100
LED_0603 [mil] "LED_0603"
  rect 30x40 smd mask+2: 1(-32.5,0) 2(32.5,0)
  silkscreen extent -70,-35 60,35
MTGH200C125D_PL [mil] "MTGH200C125D_PL"
  round 175 hole 125 mask+2: 1(-15.5,0)
OSC4_61X65LS_79X98SMD [mil] "OSC4_61X65LS_79X98SMD"
  rect 28x35 smd mask+2: 1(-32.5,-30.5) 2(32.5,-30.5) 3(32.5,30.5) 4(-32.5,30.5)
  silkscreen extent -62,-62 62,62
RD205SMD_250D [mil] "RD205SMD_250D"
  rect 120x65 smd mask+2: 1(-102.5,0) 2(102.5,0)
  silkscreen extent -188,-125 125,125
RES0402 [mm] "Chip Resistor, 2-Leads, Body 1.00x0.50mm, IPC Medium Density"
  rect 0.55x0.55 smd: 1(-0.45,0) 2(0.45,0)
  body extent -0.53,-0.28 0.53,0.28, height 0.4
SD-MICRO-SCHA5B0300 [mil] "SD-MICRO-SCHA5B0300"
  rect 36x18 smd mask+2: 1(285.72,130) 2(285.72,157.56) 3(285.72,185.12) 4(285.72,212.68) 5(-285.72,212.68) 6(-285.72,185.12) 7(-285.72,157.56) 8(-285.72,130)
  rect 20x35 smd mask+2: 9(-148.62,-263.28) 10(235.24,-263.28)
  rect 35x79 smd mask+2: 11(285.43,-170.59) 12(-285.43,-119.41)
  rect 44x60 smd mask+2: 13(283.32,262.48) 14(-283.32,262.48)
  rect 47x43 smd mask+2: 15(134.84,-282.91) 16(-101.37,-282.91)
  silkscreen extent -288,-288 288,315
SIP6 [mil] "SIP6"
  rect 60x60 hole 40 mask+2: 1(0,250)
  round 60 hole 40 mask+2: 2(0,150) 3(0,50) 4(0,-50) 5(0,-150) 6(0,-250)
  silkscreen extent -50,-300 50,300
SM-7351-IND-0805 [mil] "SM-7351-IND-0805"
  rect 55x61 smd mask+2: 1(37.4,0) 2(-37.4,0)
  silkscreen extent -43,-28 43,28
SOIC-8 [mm] "SOIC, 8-Leads, Body 4.90x3.90mm, Pitch 1.27mm, IPC Medium Density"
  oval 1.45x0.6 smd: 1(-2.725,1.905) 2(-2.725,0.635) 3(-2.725,-0.635) 4(-2.725,-1.905) 5(2.725,-1.905) 6(2.725,-0.635) 7(2.725,0.635) 8(2.725,1.905)
  silkscreen extent -2.85,-2.5 1.6,2.88, body extent -3,-2.5 3,2.5, height 1.75
SOT23-5 [mil] "SOT23-5"
  rect 25x40 smd mask+2: 1(37.5,51) 2(0,51) 3(-37.5,51) 4(-37.5,-51) 5(37.5,-51)
  silkscreen extent -75,-88 75,88
SW4SMD_63X161LS [mil] "SW4SMD_63X161LS"
  rect 35x40 smd mask+2: 1(-80.71,-31.5) 2(-80.71,31.5) 3(80.71,-31.5) 4(80.71,31.5)
  silkscreen extent -108,-59 108,59
tp1-8040 [mil] "TP1-8040"
  round 60 hole 40 mask+2: 1(0,0)
  silkscreen extent -50,-50 50,50
TP60C33D [mil] "TP60C33D"
  round 60 hole 30 mask+2: 1(0,0)
  silkscreen extent -50,-50 50,50
TP60C_SMD [mm] "TP60C_SMD"
  round 1.27 smd mask+0.051: 1(0,0)
U_6_DRY [mil] "U_6_DRY"
  rect 12x20 smd mask+2: 1(-19.68,-17.28) 2(0,-17.28) 3(19.68,-17.28) 4(19.68,17.28) 5(0,17.28) 6(-19.68,17.28)
  silkscreen extent -30,-21 30,21
U_48_RSL [mil] "U_48_RSL"
  rect 31.5x7.87 smd mask+2: 1(-121.06,86.61) 2(-121.06,70.87) 3(-121.06,55.12) 4(-121.06,39.37) 5(-121.06,23.62) 6(-121.06,7.87) 7(-121.06,-7.87) 8(-121.06,-23.62) 9(-121.06,-39.37) 10(-121.06,-55.12) 11(-121.06,-70.87) 12(-121.06,-86.61) 25(121.06,-86.61) 26(121.06,-70.87) 27(121.06,-55.12) 28(121.06,-39.37) 29(121.06,-23.62) 30(121.06,-7.87) 31(121.06,7.87) 32(121.06,23.62) 33(121.06,39.37) 34(121.06,55.12) 35(121.06,70.87) 36(121.06,86.61)
  rect 7.87x31.5 smd mask+2: 13(-86.61,-121.06) 14(-70.87,-121.06) 15(-55.12,-121.06) 16(-39.37,-121.06) 17(-23.62,-121.06) 18(-7.87,-121.06) 19(7.87,-121.06) 20(23.62,-121.06) 21(39.37,-121.06) 22(55.12,-121.06) 23(70.87,-121.06) 24(86.61,-121.06) 37(86.61,121.06) 38(70.87,121.06) 39(55.12,121.06) 40(39.37,121.06) 41(23.62,121.06) 42(7.87,121.06) 43(-7.87,121.06) 44(-23.62,121.06) 45(-39.37,121.06) 46(-55.12,121.06) 47(-70.87,121.06) 48(-86.61,121.06)
  rect 159.45x159.45 smd mask+2: 49(-8.86,8.86)
  silkscreen extent -121,-121 121,121
USB5MINI_4SHIELDED_SMD-5 [mm] "USB5MINI_4SHIELDED_SMD-5"
  rect 1.4x0.5 smd mask+0.051: 1(-3,-1.6) 2(-3,-0.8) 3(-3,0) 4(-3,0.8) 5(-3,1.6)
  rect 3.81x2.54 smd mask+0.051: 6(-0.6,-4.2) 7(-0.6,4.2)
  rect 0.8x2.35 smd mask+0.051: 8(2.2,-2.675) 9(2.2,2.675)
  Top Layer keep-out region: 1.35,-3.9 1.75,-3.9 1.75,-1.45 2.65,-1.45 2.65,-3.9 3.1,-3.9 3.1,3.9 2.65,3.9 2.65,1.45 1.75,1.45 1.75,3.9 1.35,3.9 1.35,2.9 1,2.9 1,1.5 -0.5,1.5 -0.5,-1.5 1,-1.5 1,-2.9 1.35,-2.9 1.35,-3.9
  silkscreen extent -3.4,-3.85 3.6,3.85
XTAL4_126-216SMD [mil] "XTAL4_126-216SMD"
  rect 50x75 smd mask+2: 1(-108.2,-63) 2(108.3,-63) 3(108.3,63) 4(-108.2,63)
  silkscreen extent -162,-88 162,88
XTAL150SMD_125X196 [mil] "XTAL150SMD_125X196"
  rect 70x85 smd mask+2: 1(-74.8,0) 2(74.8,0)
  silkscreen extent -118,-69 118,69

## Part data
C1 C2 C4 C5 C6 C7 C8 C9 C10 C11 C12 C13: library part CAP_10uF, "MLCC 10uF 0805 SMD", Capacitance=10uF, Case/Package=0805, Case Code (Metric)=2012, Dielectric=X6S, Dielectric Material=Ceramic, Manufacturer=TDK, Max Operating Temperature=105°C, Min Operating Temperature=-55°C, Package Quantity=4000, Supplier Part Number 1=445-7613-1-ND, Tolerance=10%, Voltage Rating=10V, Case Code (Imperial)=0805, ComponentLink3Description=Datasheet, ComponentLink3URL=https://datasheet.ciiva.com/6290/tdkmlcccaprange-6290501.pdf?src-supplier=Digi-Key, Composition=Ceramic, Depth=1.25mm, Height=1.25mm, Lead Free="Lead Free", Length=2mm, Manufacturer Part Number=C2012X6S1A106K085AC, Mount="Surface Mount", Packaging="Tape and Reel", Pricing 1="1=0.30000, 10=0.20500, 100=0.11610, 500=0.08198, 1000=0.07173 (USD)", REACH SVHC="No SVHC", RoHS=Yes, Stock 1=46852, Supplier 1=Digi-Key, Termination=SMD/SMT, Thickness=0.037inch, Voltage Rating (DC)=10V, Weight=0.000194oz, Width=0.049inch
C3 C18: library part CAP_100nF, "MLCC 100nF 0402 SMD", Capacitance=100nF, Case/Package=0402, Case Code (Metric)=1005, Dielectric=X7R, Manufacturer=KEMET, Max Operating Temperature=125°C, Min Operating Temperature=-55°C, Package Quantity=10000, Supplier Part Number 1=399-3521-1-ND, Tolerance=10%, Voltage Rating=16V, Case Code (Imperial)=0402, ComponentLink2Description=Datasheet, ComponentLink2URL=https://datasheet.ciiva.com/18192/getdatasheetpartid-385384-18192412.pdf?src-supplier=Verical, Contact Plating=Tin,Matte, Depth=0.5mm, Dissipation Factor=3.5%, Height=0.5mm, Length=1mm, Manufacturer Part Number=C0402C104K4RACTU, Mount="Surface Mount", Packaging="Tape and Reel", Pricing 1="1=0.10000, 10=0.04200, 100=0.01860, 500=0.01328, 1000=0.01044, 2500=0.00949, 5000=0.00873 (USD)", Radiation Hardening=No, RoHS=Yes, Stock 1=6512243, Supplier 1=Digi-Key, Termination=SMD/SMT, Voltage Rating (DC)=16V, Width=0.5mm
C14 C15 C16: library part CAP_2.2uF, "MLCC 2.2uF 0402 SMD", Capacitance=2.2uF, Case/Package=0402, Case Code (Metric)=1005, Dielectric=X5R, Dielectric Material=Ceramic, Manufacturer=TDK, Max Operating Temperature=85°C, Min Operating Temperature=-55°C, Package Quantity=1, Tolerance=10%, Voltage=6.3V, Case Code (Imperial)=0402, ComponentLink7Description=Datasheet, ComponentLink7URL=https://product.tdk.com/info/en/catalog/datasheets/mlcc_commercial_general_en.pdf?ref_disty=digikey, Composition=Ceramic, Depth=0.5mm, Height=0.5mm, Lead Free="Lead Free", Length=1mm, Manufacturer Part Number=C1005X5R0J225K050BC, Mount="Surface Mount", Number of Pins=2, Packaging="Tape and Reel", Pricing 1="1=0.20000, 10=0.13800, 100=0.07010, 500=0.04794, 1000=0.04240, 2500=0.04056, 5000=0.03687 (USD)", Radiation Hardening=No, REACH SVHC="No SVHC", RoHS=Yes, Stock 1=256055, Supplier 1=Digi-Key, Termination=SMD/SMT, Thickness=0.022inch, Voltage Rating=6.3V, Voltage Rating (DC)=6.3V, Weight=2.3E-05oz, Width=0.02inch
C34: library part "CAP SMD", "CAP ALUM 100UF 6.3V 20% SMD", Capacitance=100µF, ESR (Equivalent Series Resistance)="4.64 Ohm", Lifetime @ Temp.="2000 Hrs @ 85°C", Manufacturer="Cornell Dubilier Electronics (CDE)", Manufacturer Part Number=AVE107M06D16T-F, Operating Temperature="-40°C ~ 85°C", Package / Case="Radial, Can - SMD", Ripple Current=120mA, Supplier Part Number 1=338-1787-6-ND, Tolerance=±20%, Voltage Rating=6.3V, Category=Capacitors, ComponentLink1Description=http://www.cde.com/catalogs/AVE.pdf, ComponentLink1URL=http://www.cde.com/catalogs/AVE.pdf, Features="General Purpose", Height - Seated (Max)="0.209\" (5.30mm)", Impedance=-, Lead Spacing=-, Mounting Type="Surface Mount", Packaging=Digi-Reel®, Pricing 1="1=0.17, 10=0.16, 100=0.133, 250=0.11844, 500=0.0987 (USD)", RoHS="RoHS Compliant", Size / Dimension="0.248\" Dia (6.30mm)", Stock 1=2601, Supplier 1=Digi-Key, Surface Mount Land Size="0.260\" L x 0.260\" W (6.60mm x 6.60mm)"
D1: library part LED_LTST-C150GKT, "LED GREEN CLEAR 0805 SMD", Color=Green, Current - Test=20mA, Luminous Flux @ Current - Test=-, Manufacturer="Lite-On Inc", Manufacturer Part Number=LTST-C170KGKT, Millicandela Rating=35mcd, Package / Case="0805 (2012 Metric)", Supplier Part Number 1=160-1414-6-ND, Voltage - Forward (Vf) Typ=2V, Category=Optoelectronics, CLASS=DISCRETE, ComponentLink1Description=http://optoelectronics.liteon.com/en-us/api/DwonloadFileHandler.ashx?txtSpecNo=DS22-2000-073&txtPartNo=LTST-C170KGKT, ComponentLink1URL=http://optoelectronics.liteon.com/en-us/api/DwonloadFileHandler.ashx?txtSpecNo=DS22-2000-073&txtPartNo=LTST-C170KGKT, Height=1.10mm, Lens Style/Size="Rectangle with Flat Top, 1.4mm x 1.25mm", Lens Type=Clear, Mounting Type="Surface Mount", Packaging=Digi-Reel®, Pricing 1="1=0.37, 10=0.267, 100=0.1574, 250=0.11136, 500=0.09504, 1000=0.07425 (USD)", RoHS="RoHS Compliant", Size / Dimension="2.00mm L x 1.25mm W", Stock 1=274890, Supplier 1=Digi-Key, TN=257-0020-000, Viewing Angle=130°, Wavelength - Dominant=571nm, Wavelength - Peak=574nm
FB1 FB2 FB3 FB7: library part FER_180_200_0, "FERRITE 800MA 150 OHM 0805 SMD", Current Rating=800mA, DC Resistance (DCR)="150 mOhm Max", Impedance @ Frequency="150 Ohm @ 100MHz", Manufacturer="Laird-Signal Integrity Products", Manufacturer Part Number=LI0805H151R-10, Mfr=Steward, Package / Case="0805 (2012 Metric)", PartName=FerriteBead150ohm800mA, Supplier Part Number 1=240-2384-6-ND, TIIntPartnumber=1L0010, Category=Filters, ComponentLink1Description=http://www.lairdtech.com/WorkArea/linkit.aspx?LinkIdentifier=id&ItemID=4912, ComponentLink1URL=http://www.lairdtech.com/WorkArea/linkit.aspx?LinkIdentifier=id&ItemID=4912, Filter Type="Differential Mode - Single", Height (Max)="0.043\" (1.10mm)", MfrNum=LI0805H151R-10, Mounting Type="Surface Mount", Packaging=Digi-Reel®, Pricing 1="1=0.1, 10=0.07, 25=0.064, 50=0.0574, 100=0.0421, 250=0.03064, 500=0.02808, 1000=0.02424 (USD)", RoHS="RoHS Compliant", Size / Dimension="0.079\" L x 0.049\" W (2.00mm x 1.25mm)", Stock 1=3694, Supplier 1=Digi-Key, Vendor=Digikey
FB8: library part FER_180_200_0, "RES .10 OHM 1/8W 5% 0805", Manufacturer="CTS Resistor Products", Manufacturer Part Number=73L3R10J, Package / Case="0805 (2012 Metric)", Power (Watts)="0.125W, 1/8W", Resistance (Ohms)=0.1, Supplier Device Package=0805, Supplier Part Number 1=73L3R10JDKR-ND, Temperature Coefficient=±200ppm/°C, Tolerance=±5%, Category=Resistors, ComponentLink1Description=http://www.ctscorp.com/components/Datasheets/008-0337-0.pdf, ComponentLink1URL=http://www.ctscorp.com/components/Datasheets/008-0337-0.pdf, Composition="Thick Film", Features="Current Sense", Height="0.026\" (0.65mm)", Number of Terminations=2, Packaging=Digi-Reel®, Pricing 1="1=0.1, 10=0.066, 100=0.0267, 250=0.0204, 500=0.01632, 1000=0.01201 (USD)", RoHS="RoHS Compliant", Size / Dimension="0.079\" L x 0.049\" W (2.00mm x 1.25mm)", Stock 1=1186, Supplier 1=Digi-Key
IC1: "LDO Voltage Regulator", Current - Limit (Min)=-, Current - Output="500mA (Max)", Manufacturer="Texas Instruments", Manufacturer Part Number=TL5209DR, Operating Temperature="-40°C ~ 125°C", Package / Case="8-SOIC (0.154\", 3.90mm Width)", Supplier Device Package=8-SOIC, Supplier Part Number 1=296-21569-6-ND, Voltage - Dropout (Typical)="0.35V @ 500mA", Voltage - Input="2.5 V ~ 16 V", Voltage - Output="2.5 V ~ 6.5 V", Category="Integrated Circuits (ICs)", ComponentLink1Description=http://media.digikey.com/pdf/Data%20Sheets/Texas%20Instruments%20PDFs/TL5209.pdf, ComponentLink1URL=http://media.digikey.com/pdf/Data%20Sheets/Texas%20Instruments%20PDFs/TL5209.pdf, Mounting Type="Surface Mount", Number of Regulators=1, Packaging=Digi-Reel®, Pricing 1="1=1.41, 10=1.244, 25=1.1232, 100=0.9828, 250=0.86192, 500=0.7644, 1000=0.6045 (USD)", Regulator Topology="Positive Adjustable", RoHS="RoHS Compliant", Stock 1=7190, Supplier 1=Digi-Key
J1: library part HDR_6x1, "CONN HEADER 6POS, VERTICAL,  .100 STR TIN", Color=Black, Manufacturer="Samtec Inc", Manufacturer Part Number=FTR-110-03-G-D-06, Supplier Part Number 1=FTR-110-03-G-D-06-ND, Category="Connectors, Interconnects", ComponentLink1Description=http://www.samtec.com/documents/webfiles/cpdf/FTR-1XX-XX-XX-D-X-XX-MKT.pdf, ComponentLink1URL=http://www.samtec.com/documents/webfiles/cpdf/FTR-1XX-XX-XX-D-X-XX-MKT.pdf, Connector Type=Unshrouded, Contact Finish=Gold, Contact Finish Thickness="10µin (0.25µm)", Contact Mating Length="0.125\" (3.18mm)", Features=-, Height Stacking (Mating)=-, Molding Height Above Board="0.100\" (2.54mm)", Mounting Type="Surface Mount", Number of Positions=20, Number of Positions Loaded=19, Number of Rows=2, Packaging=Tube, Pitch="0.050\" (1.27mm)", Pricing 1="1=4.47 (USD)", RoHS="RoHS Compliant", Row Spacing="0.100\" (2.54mm)", Stock 1=0, Supplier 1=Digi-Key, Termination=Solder
L1: library part IND_2.2uH_2.6A_10%_SMD, "Inductor 2.2uH smt 2.6A, 58 milliohm", Current - Saturation=-, Current Rating=1.3A, DC Resistance (DCR)="100 mOhm Max", Frequency - Self Resonant=40MHz, Frequency - Test=1MHz, Inductance=2.2µH, Manufacturer="Murata Electronics North America", Manufacturer Part Number=LQM2HPN2R2MG0L, Operating Temperature="-55°C ~ 125°C", Package / Case="1008 (2520 Metric)", Supplier Part Number 1=490-5114-6-ND, Tolerance=±20%, Category="Inductors, Coils, Chokes", ComponentLink1Description=http://search.murata.co.jp/Ceramy/image/img/PDF/ENG/L0075S0104LQM2HP_G0.pdf, ComponentLink1URL=http://search.murata.co.jp/Ceramy/image/img/PDF/ENG/L0075S0104LQM2HP_G0.pdf, Material - Core=-, Mounting Type="Surface Mount", Packaging=Digi-Reel®, Pricing 1="1=0.34, 10=0.307, 25=0.2728, 50=0.2388, 100=0.2217, 250=0.2046, 500=0.19438, 750=0.17732, 1000=0.15686 (USD)", Q @ Freq=-, RoHS="RoHS Compliant", Shielding=Shielded, Size / Dimension="0.098\" L x 0.079\" W x 0.035\" H (2.50mm x 2.00mm x 0.90mm)", Stock 1=4689, Supplier 1=Digi-Key, Type=-
L2 L3: library part IND_2.2uH_2.6A_10%_SMD, "INDUCTOR 2.2UH 20% 1300MA 1008", Current - Saturation=-, Current Rating=1.3A, DC Resistance (DCR)="100 mOhm Max", Frequency - Self Resonant=40MHz, Frequency - Test=1MHz, Inductance=2.2µH, Manufacturer="Murata Electronics North America", Manufacturer Part Number=LQM2HPN2R2MG0L, Mfr=TDK, MfrNum=VLCF5020T-2R2N2R6-3, Operating Temperature="-55°C ~ 125°C", Package / Case="1008 (2520 Metric)", PartName=2.2uH10%2.6Asmd, Supplier Part Number 1=490-5114-6-ND, TIIntPartnumber=1L0025, Tolerance=±20%, Category="Inductors, Coils, Chokes", ComponentLink1Description=http://www.tdk.co.jp/tefe02/e531_vlcf.pdf, ComponentLink1URL=http://www.tdk.co.jp/tefe02/e531_vlcf.pdf, Cost10K=0.37, Cost100=1.11, Material - Core=-, Mounting Type="Surface Mount", Packaging=Digi-Reel®, Pricing 1="1=0.34, 10=0.307, 25=0.2728, 50=0.2388, 100=0.2217, 250=0.2046, 500=0.19438, 750=0.17732, 1000=0.15686 (USD)", Q @ Freq=-, RoHS="RoHS Compliant", Shielding=Shielded, Size / Dimension="0.098\" L x 0.079\" W x 0.035\" H (2.50mm x 2.00mm x 0.90mm)", Stock 1=4689, Supplier 1=Digi-Key, Type=-, Vendor=Digikey
P1: library part Power_Jack, "CONN PWR JACK 2.1X5.5MM HIGH CUR", Color=Black, Current Rating=5A, Manufacturer="CUI Inc", Manufacturer Part Number=PJ-002AH, Operating Temperature="-25°C ~ 85°C", Supplier Part Number 1=CP-002AH-ND, Category="Connectors, Interconnects", ComponentLink1Description=http://www.cui.com/Product/Resource/DigiKeyPDF/PJ-002AH.pdf, ComponentLink1URL=http://www.cui.com/Product/Resource/DigiKeyPDF/PJ-002AH.pdf, Connector Type=Jack, Contact Material="Copper Alloy", Contact Material - Plating=Nickel, Features=-, Gender=Male, Housing Color=Black, Housing Material=Thermoplastic, Internal Switch(s)="Single Switch, Normally Closed", Mounting Type="Through Hole, Right Angle", Number of Positions/Contacts="2 Conductors, 3 Contacts", Plug/Mating Plug Diameter="2.1mm ID, 5.5mm OD", Pricing 1="1=1.01, 10=0.704, 100=0.4724, 500=0.3819, 1000=0.3417, 2500=0.27135 (USD)", RoHS="RoHS Compliant", Shielding=Unshielded, Stock 1=81962, Supplier 1=Digi-Key, Termination="Solder Eyelet(s)"
P2: library part HDR_10x2_CJTAG, "Dual Line Header 10x2pin Tin", Color=Black, Manufacturer="Samtec Inc", Manufacturer Part Number=FTR-110-03-G-D-06, Supplier Part Number 1=FTR-110-03-G-D-06-ND, Category="Connectors, Interconnects", ComponentLink1Description=http://www.samtec.com/documents/webfiles/cpdf/FTR-1XX-XX-XX-D-X-XX-MKT.pdf, ComponentLink1URL=http://www.samtec.com/documents/webfiles/cpdf/FTR-1XX-XX-XX-D-X-XX-MKT.pdf, Connector Type=Unshrouded, Contact Finish=Gold, Contact Finish Thickness="10µin (0.25µm)", Contact Mating Length="0.125\" (3.18mm)", Features=-, Height Stacking (Mating)=-, Molding Height Above Board="0.100\" (2.54mm)", Mounting Type="Surface Mount", Number of Positions=20, Number of Positions Loaded=19, Number of Rows=2, Packaging=Tube, Pitch="0.050\" (1.27mm)", Pricing 1="1=4.47 (USD)", RoHS="RoHS Compliant", Row Spacing="0.100\" (2.54mm)", Stock 1=0, Supplier 1=Digi-Key, Termination=Solder
P4: library part MINI-USB-AB-SOCKET, "CONN RCPT USB MINI B R/A SMD", Manufacturer=KYCON, Manufacturer 2=AMP, Manufacturer Part Number=0565790576, Supplier Part Number 1=WM17122DKR-ND, ATLStockNo1=4500.0223, Category="Connectors, Interconnects", ComponentLink1Description=http://www.molex.com/pdm_docs/sd/565790576_sd.pdf, ComponentLink1URL=http://www.molex.com/pdm_docs/sd/565790576_sd.pdf, Connector Type="USB - mini AB", Distributor=Deltron, Distributor 2=Tyco, Features=Shielded, Gender=Receptacle, Ingress Protection=-, Mounting Type="Surface Mount, Right Angle, Horizontal", Number of Contacts=5, Order#=KMAB-SMT-5S-S-30TR, Order# 2=C-440247, Packaging=Digi-Reel®, Pricing 1="1=2.92, 10=2.649, 25=2.4872, 50=2.3792, 100=2.271, 250=2.05468 (USD)", RoHS="RoHS Compliant", Specifications="USB 2.0 OTG", Stock 1=12426, Supplier 1=Digi-Key
P8 P9: library part HDR_46_F_2_0.1_0.1, "CONN HEADER FMAL 46PS.1\" DL GOLD", Color=Black, Manufacturer="Sullins Connector Solutions", Manufacturer Part Number=PPPC232LFBN-RC, Supplier Part Number 1=S7126-ND, Category="Connectors, Interconnects", ComponentLink1Description=http://www.sullinscorp.com/drawings/78_P(N)PxCxxxLFBN-RC,_10492-G.pdf, ComponentLink1URL=http://www.sullinscorp.com/drawings/78_P(N)PxCxxxLFBN-RC,_10492-G.pdf, Connector Type=Header, Contact Finish=Gold, Contact Finish Thickness=Flash, Contact Type="Female Socket", Fastening Type=-, Features=-, Mounting Type="Through Hole", Number of Positions=46, Number of Positions Loaded=All, Number of Rows=2, Packaging=Bulk, Pitch="0.100\" (2.54mm)", Pricing 1="1=2.75, 10=2.325, 25=2.2196, 50=2.0084, 100=1.7969, 250=1.58552, 500=1.4798, 1000=1.3741, 2500=1.32125 (USD)", RoHS="RoHS Compliant", Row Spacing="0.100\" (2.54mm)", Stock 1=750, Supplier 1=Digi-Key, Termination=Solder
P10: library part microSD_CONN_2, "CONN MICRO SD R/A PUSH-PUSH SMD", Manufacturer="Molex Inc", Manufacturer Part Number=5025700893, Supplier Part Number 1=WM19093TR-ND, Card Type="Secure Digital - microSD™ TransFlash", Category="Connectors, Interconnects", ComponentLink1Description=http://www.molex.com/pdm_docs/sd/5025700893_sd.pdf, ComponentLink1URL=http://www.molex.com/pdm_docs/sd/5025700893_sd.pdf, Connector Type="Connector and Ejector", Contact Finish=Gold, Contact Finish Thickness="20µin (0.51µm)", Ejector Side=-, Features=Switch, Height Above Board="0.071\" (1.80mm)", Insertion, Removal Method="Push In, Push Out", Mounting Feature="Normal, Standard - Top", Mounting Type="Surface Mount, Right Angle", Number of Positions="10 (8 + 2)", Packaging="Tape & Reel (TR)", Pricing 1="1300=2.16645, 2600=2.01703, 6500=1.94233 (USD)", RoHS="RoHS Compliant", Stock 1=16900, Supplier 1=Digi-Key
R1: library part RES_100k, "Resistor 100kOhm 0402 SMD", Case/Package=0402, Case Code (Metric)=1005, Manufacturer=Yageo, Max Operating Temperature=155°C, Max Power Dissipation=63mW, Min Operating Temperature=-55°C, Package Quantity=1, Resistance=100k, Supplier Part Number 1=603-RC0402FR-07100KL, Temperature Coefficient=100ppm/°C, Tolerance=1%, Voltage Rating=50V, Case Code (Imperial)=0402, ComponentLink2Description=Datasheet, ComponentLink2URL=https://www.yageo.com/upload/media/product/productsearch/datasheet/rchip/PYu-RC_Group_51_RoHS_L_10.pdf, Composition="Thick Film", Depth=0.5mm, Features="Moisture Resistant", Height=0.016inch, Lead Free="Lead Free", Length=0.039inch, Manufacturer Part Number=RC0402FR-07100KL, Military Standard=Not, Number of Terminations=2, Packaging="Tape and Reel", Power Rating=63mW, REACH SVHC="No SVHC", RoHS=Yes, Supplier 1=Mouser, Supplier 2=Digi-Key, Supplier Part Number 2=311-100KLRCT-ND, Termination=SMD/SMT, Width=0.02inch, Working Voltage=50V
R2 R3: library part RES_1.5k, "Resistor 1.5kOhm 0402 SMD", Case/Package=0402, Case Code (Metric)=1005, Manufacturer=Yageo, Max Operating Temperature=155°C, Max Power Dissipation=63mW, Min Operating Temperature=-55°C, Package Quantity=1, Power Rating=62.5mW, Resistance=1.5k, Supplier Part Number 1=311-1.50KLRCT-ND, Temperature Coefficient=100ppm/°C, Tolerance=1%, Voltage Rating=50V, Case Code (Imperial)=0402, ComponentLink1Description=Datasheet, ComponentLink1URL=https://www.yageo.com/upload/media/product/productsearch/datasheet/rchip/PYu-RC_Group_51_RoHS_L_10.pdf, Composition="Thick Film", Depth=0.5mm, Features="Moisture Resistant", Height=0.016inch, Lead Free="Lead Free", Length=1mm, Manufacturer Part Number=RC0402FR-071K5L, Military Standard=Not, Number of Terminations=2, Packaging="Tape and Reel", REACH SVHC="No SVHC", RoHS=Yes, Supplier 1=Digi-Key, Supplier 2=Mouser, Supplier Part Number 2=603-RC0402FR-071K5L, Termination=SMD/SMT, Width=0.02inch
R4 R5 R6 R7: library part RES_0, "Resistor 0Ohm 0402 SMD", Case/Package=0402, Case Code (Metric)=1005, Manufacturer=Yageo, Max Operating Temperature=155°C, Max Power Dissipation=63mW, Min Operating Temperature=-55°C, Package Quantity=1, Power Rating=62.5mW, Resistance=0, Supplier Part Number 1=311-0.0JRCT-ND, Temperature Coefficient=200ppm/°C, Tolerance=5%, Voltage Rating=50V, Case Code (Imperial)=0402, ComponentLink1Description=Digikey, ComponentLink1URL=https://www.digikey.com/product-detail/en/yageo/RC0402JR-070RL/311-0.0JRCT-ND/729353, ComponentLink2Description=Datasheet, ComponentLink2URL=https://www.yageo.com/upload/media/product/productsearch/datasheet/rchip/PYu-RC_Group_51_RoHS_L_10.pdf, Composition="Thick Film", Contact Plating=Tin,Matte, Depth=0.5mm, Features="Moisture Resistant", Height=0.016inch, Lead Free="Lead Free", Length=1mm, Manufacturer Part Number=RC0402JR-070RL, Military Standard=Not, Number of Terminations=2, Packaging="Tape and Reel", Pricing 1="1=0.10000, 10=0.01300, 25=0.00920, 50=0.00700, 100=0.00510, 250=0.00392, 500=0.00312, 1000=0.00230, 5000=0.00165 (USD)", Radiation Hardening=No, REACH SVHC=Unknown, RoHS=Yes, Stock 1=68160806, Supplier 1=Digi-Key, Termination=SMD/SMT, Width=0.02inch
R8: library part RES_0, "Resistor 0Ohm 0402 SMD", Case/Package=0402, Case Code (Metric)=1005, Manufacturer=Yageo, Max Operating Temperature=155°C, Max Power Dissipation=63mW, Min Operating Temperature=-55°C, Package Quantity=1, Power Rating=62.5mW, Resistance=0/DNI, Supplier Part Number 1=311-0.0JRCT-ND, Temperature Coefficient=200ppm/°C, Tolerance=5%, Voltage Rating=50V, Case Code (Imperial)=0402, ComponentLink1Description=Digikey, ComponentLink1URL=https://www.digikey.com/product-detail/en/yageo/RC0402JR-070RL/311-0.0JRCT-ND/729353, ComponentLink2Description=Datasheet, ComponentLink2URL=https://www.yageo.com/upload/media/product/productsearch/datasheet/rchip/PYu-RC_Group_51_RoHS_L_10.pdf, Composition="Thick Film", Contact Plating=Tin,Matte, Depth=0.5mm, Features="Moisture Resistant", Height=0.016inch, Lead Free="Lead Free", Length=1mm, Manufacturer Part Number=RC0402JR-070RL, Military Standard=Not, Number of Terminations=2, Packaging="Tape and Reel", Pricing 1="1=0.10000, 10=0.01300, 25=0.00920, 50=0.00700, 100=0.00510, 250=0.00392, 500=0.00312, 1000=0.00230, 5000=0.00165 (USD)", Radiation Hardening=No, REACH SVHC=Unknown, RoHS=Yes, Stock 1=68160806, Supplier 1=Digi-Key, Termination=SMD/SMT, Width=0.02inch
R9: library part RES_820, "Resistor 820Ohm 0402 SMD", Case/Package=0402, Case Code (Metric)=1005, Manufacturer=Yageo, Max Operating Temperature=155°C, Max Power Dissipation=63mW, Min Operating Temperature=-55°C, Package Quantity=1, Resistance=820, Supplier Part Number 1=311-820LRCT-ND, Temperature Coefficient=100ppm/°C, Tolerance=1%, Voltage Rating=50V, Case Code (Imperial)=0402, Composition="Thick Film", Depth=0.5mm, Features="Moisture Resistant", Height=0.016inch, Lead Free="Lead Free", Length=1mm, Manufacturer Part Number=RC0402FR-07820RL, Military Standard=Not, Number of Terminations=2, Packaging="Tape and Reel", Power Rating=63mW, Pricing 1="1=0.10000, 10=0.01600, 100=0.00640, 1000=0.00289, 2500=0.00251, 5000=0.00207 (USD)", REACH SVHC=Unknown, RoHS=Yes, Stock 1=1640857, Supplier 1=Digi-Key, Termination=SMD/SMT, Width=0.5mm
R10: library part RES_470k, "Resistor 470kOhm 0402 SMD", Case/Package=0402, Case Code (Metric)=1005, Manufacturer=Yageo, Max Operating Temperature=155°C, Max Power Dissipation=63mW, Min Operating Temperature=-55°C, Package Quantity=1, Power Rating=62.5mW, Resistance=470k, Supplier Part Number 1=311-470KLRCT-ND, Temperature Coefficient=100ppm/°C, Tolerance=1%, Voltage Rating=50V, Case Code (Imperial)=0402, ComponentLink1Description=Datasheet, ComponentLink1URL=https://www.yageo.com/upload/media/product/productsearch/datasheet/rchip/PYu-RC_Group_51_RoHS_L_10.pdf, Composition="Thick Film", Depth=0.5mm, Features="Moisture Resistant", Height=0.016inch, Lead Free="Lead Free", Length=1mm, Manufacturer Part Number=RC0402FR-07470KL, Military Standard=Not, Number of Pins=2, Number of Terminations=2, Packaging="Tape and Reel", Pricing 1="1=0.10000, 10=0.01600, 100=0.00640, 1000=0.00289, 2500=0.00251, 5000=0.00207 (USD)", REACH SVHC="No SVHC", RoHS=Yes, Stock 1=2249859, Supplier 1=Digi-Key, Termination=SMD/SMT, Voltage Rating (DC)=50V, Width=0.02inch
R11: library part RES_280k, "Resistor 280kOhm 0402 SMD", Case/Package=0402, Case Code (Metric)=1005, Manufacturer=Yageo, Max Operating Temperature=155°C, Max Power Dissipation=63mW, Min Operating Temperature=-55°C, Power Rating=62.5mW, Resistance=280k, Supplier Part Number 1=YAG3087CT-ND, Temperature Coefficient=100ppm/°C, Tolerance=1%, Voltage Rating=50V, Case Code (Imperial)=0402, ComponentLink1Description=Datasheet, ComponentLink1URL=https://www.yageo.com/upload/media/product/productsearch/datasheet/rchip/PYu-RC_Group_51_RoHS_L_10.pdf, Composition="Thick Film", Contact Plating=Tin,Matte,Lead, Depth=0.5mm, Features="Moisture Resistant", Height=0.016inch, Lead Free="Lead Free", Length=1mm, Manufacturer Part Number=RC0402FR-07280KL, Military Standard=Not, Number of Terminations=2, Packaging="Tape and Reel", Pricing 1="1=0.10000, 10=0.01600, 100=0.00640, 1000=0.00289, 2500=0.00251, 5000=0.00207 (USD)", Radiation Hardening=No, RoHS=Yes, Stock 1=1301983, Supplier 1=Digi-Key, Termination=SMD/SMT, Voltage Rating (DC)=50V, Width=0.5mm
S1 S2 S3: library part KMR2, "Microminiature Tact Switch for SMT", Contact Rating @ Voltage="0.05A @ 32VDC", Illumination Type, Color=-, Manufacturer="C&K Components", Operating Force=300gf, Operating Temperature="-40°C ~ 85°C", Supplier Part Number 1=401-1429-6-ND, Actuator Height off PCB, from Pins=1.90mm, Actuator Material=-, Actuator Orientation="Top Actuated", Actuator Type=Standard, Category=Switches, Circuit=SPST-NO, ComponentLink1Description=http://www.ck-components.com/index.php?module=media&action=Display&cmpref=14414&lang=en&width=&height=&format=&alt=, ComponentLink1URL=http://www.ck-components.com/index.php?module=media&action=Display&cmpref=14414&lang=en&width=&height=&format=&alt=, Features="Grounding Pin", Illumination=Non-Illuminated, Illumination Voltage (Nominal)=-, Ingress Protection=-, Manufacturer Part Number=KMR231GLFS, Mechanical Life="150,000 Cycles", Mounting Type="Surface Mount", Outline="4.60mm x 2.80mm", Packaging=Digi-Reel®, Pricing 1="1=0.44, 10=0.416, 25=0.3744, 50=0.3326, 100=0.3188, 250=0.29108, 500=0.2772, 1000=0.22869 (USD)", RoHS="RoHS Compliant", Stock 1=32289, Supplier 1=Digi-Key, Switch Function=Off-Mom, Switch Travel=0.25mm, Termination Style="Gull Wing"